# Altium PCB PCB1.PcbDoc
Units mm, origin at the board's own origin, x right, y up, seen from the top; angles counter-clockwise.
Board outline 106.05 x 110.24 mm, 2 copper layers (Top Layer, Bottom Layer); 47 components, 34 nets, 141 pads, 46 vias.
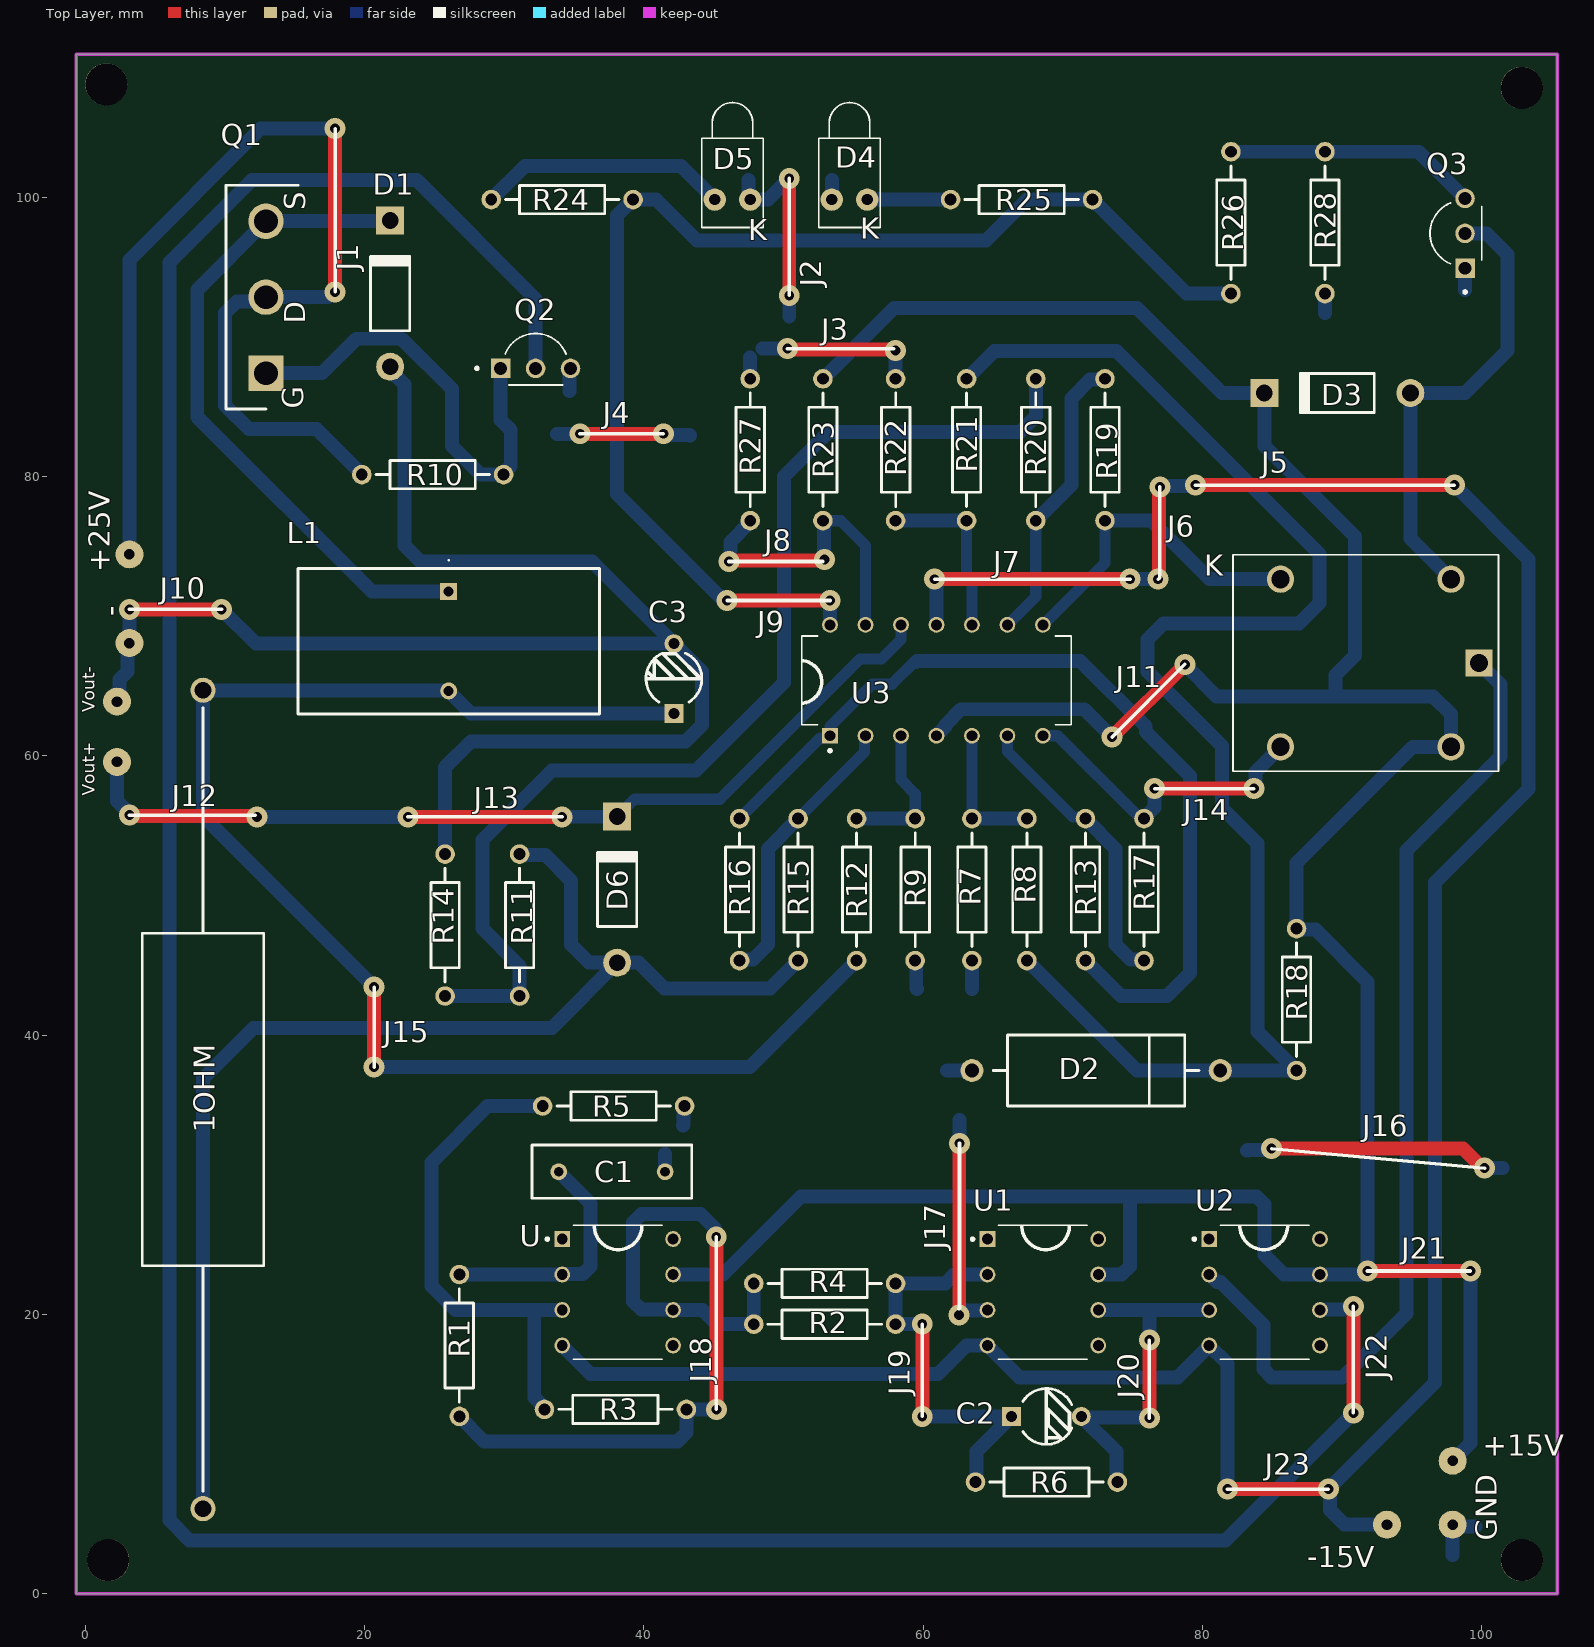
[diagram p0: Top Layer view]
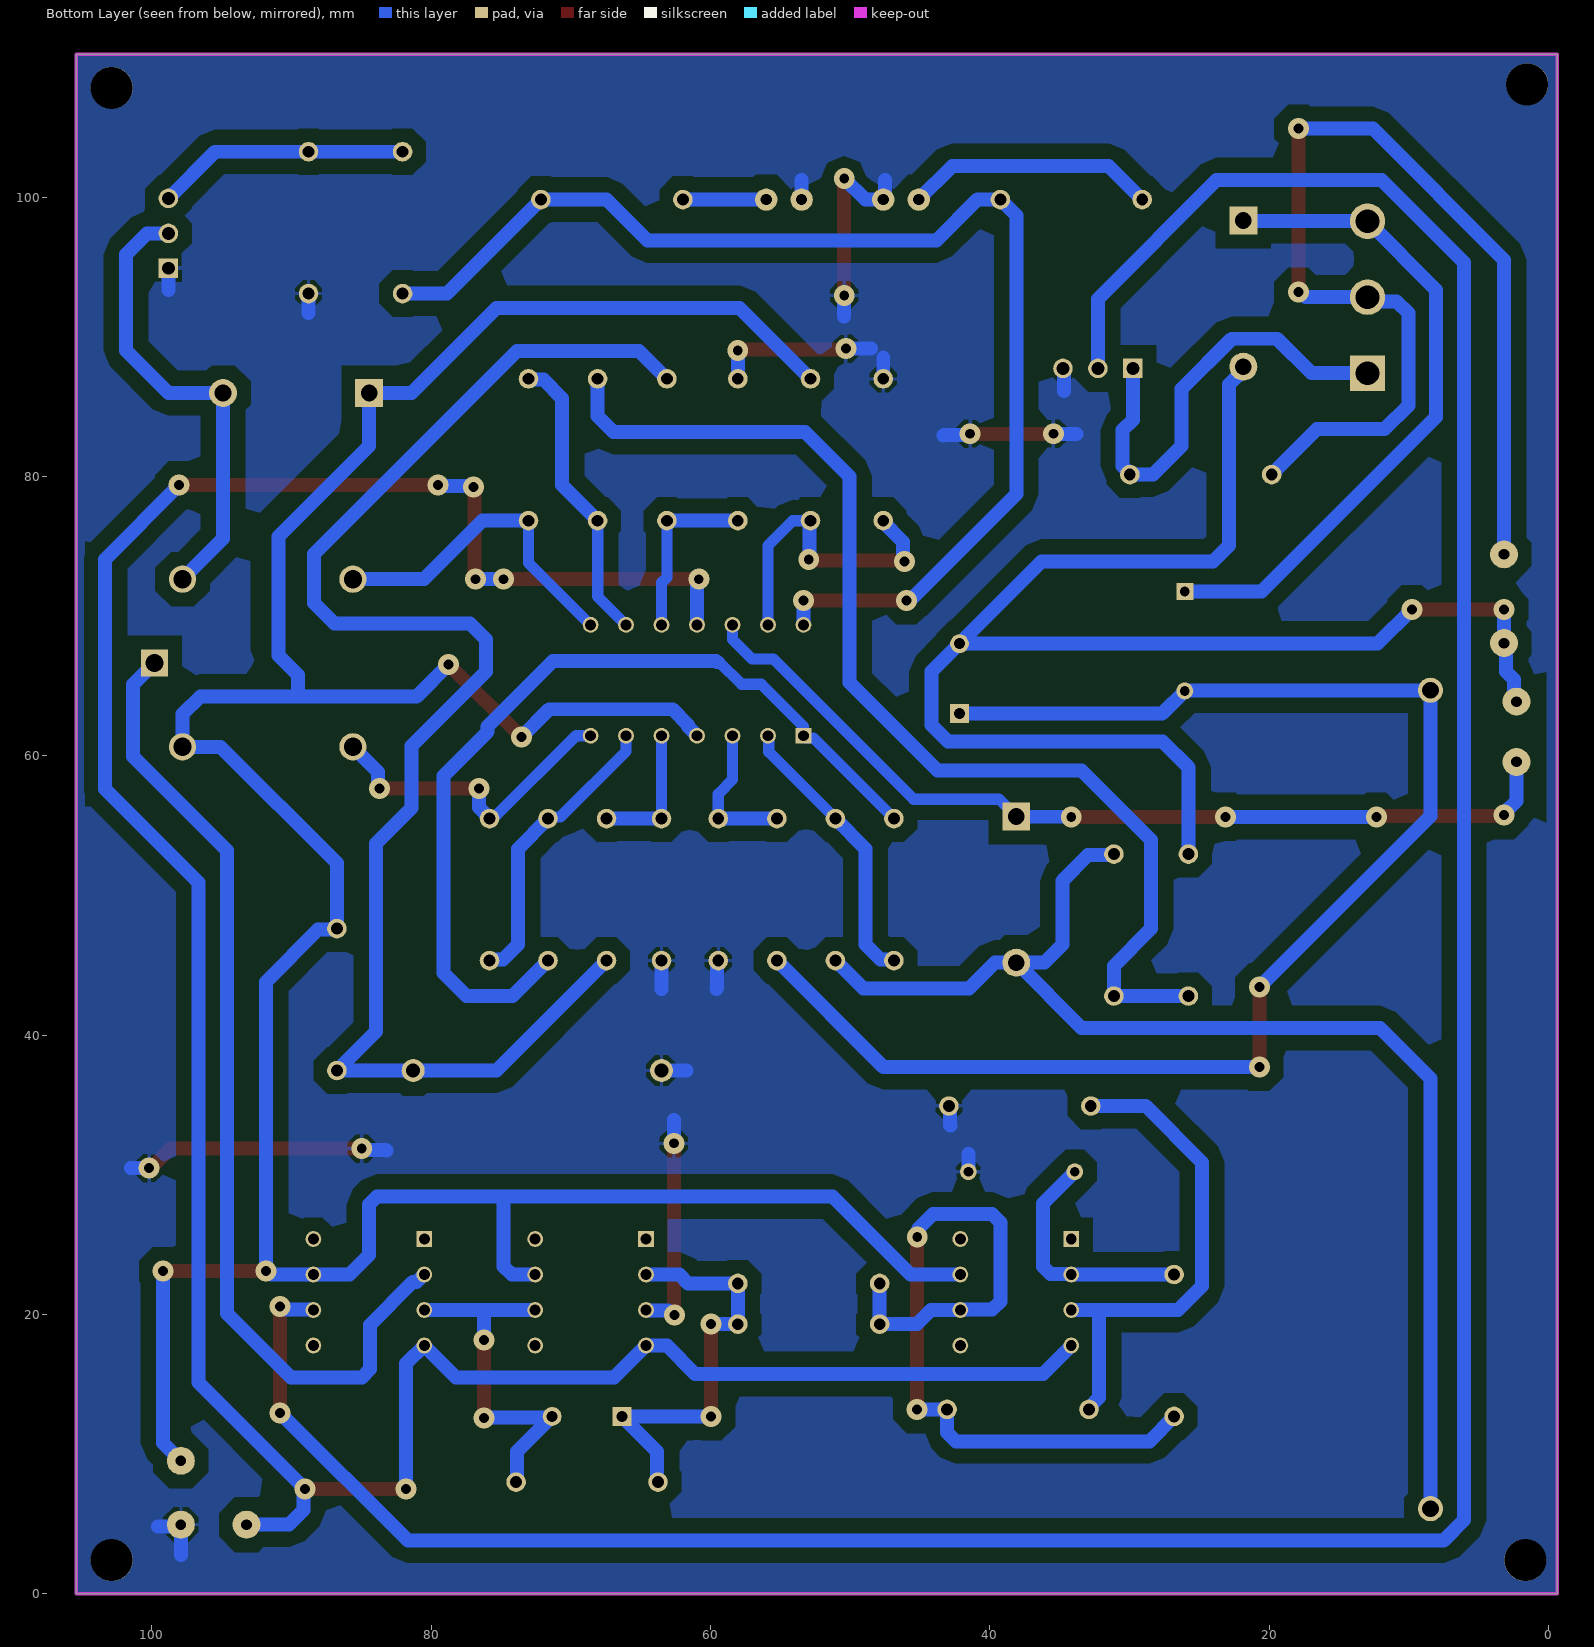
[diagram p1: Bottom Layer view, seen from below]

## Layer stack, top to bottom
Top Solder: solder mask 0.0102, Solder Resist, Dk 3.5
Top Layer: signal copper 0.0356
Dielectric 1: dielectric 0.32, FR-4, Dk 4.8
Bottom Layer: signal copper 0.0356
Bottom Solder: solder mask 0.0102, Solder Resist, Dk 3.5

## Board outline
-0.635,0 105.41,0 105.41,110.236 -0.635,110.236

## Design rules (kind name [scope] priority, off if disabled: settings)
Clearance [All] p1: gap=0 ignorepadtopadclearanceinfootprint=FALSE except(1: Arc-Arc Arc-Track Arc-Via Arc-Fill Arc-Poly Arc-Region Track-Track Track-Via Track-Fill Track-Poly Track-Region THPad-Via THPad-Fill THPad-Poly THPad-Region Via-Via Via-Fill Via-Poly Via-Region)
PolygonConnect [All] p1: connectstyle=Relief reliefconductorwidth=0.254 reliefentries=4 polygonreliefangle="90 Angle" airgapwidth=0.254
RoutingVias [All] p1: holewidth=0.711 width=1.5 viastyle="Through Hole" minholewidth=0.711 minwidth=1.5 maxholewidth=0.711 maxwidth=1.5
SolderMaskExpansion [All] p1: expansion=0.102 istentingtop=FALSE
Width [All] p1: maxlimit=1 minlimit=0.8 preferedwidth=1
30 further rules are at their usual default settings.

## Components (designator, comment, footprint, x,y, rotation, side; value= is the part's Value field where it differs from the comment)
1OHM "Current sense" RESAD5860W102L2380D870 8.449,64.696 r270 top
C1 "103" RAD-0.3 37.719,30.226 r180 top
C2 "25V" CAPR5-4X5 68.834,12.7 r0 top value=10uF
C3 "Cap2" CAPR5-4X5 42.164,65.532 r90 top value="220uF 50V"
D1 "1N5817" DO-41 21.844,93.091 r90 top
D2 "3V3" DIODE-0.7 72.39,37.465 r0 top
D3 "1N4007" DO-41 89.662,85.979 r180 top
D4 "RED (CC)" LED-1 54.737,99.822 r90 top
D5 "GREEN (CV)" LED-1 46.355,99.822 r90 top
D6 "1N5817" DO-41 38.1,50.419 r90 top
K "12V relay" TE_1461069-5 99.798,66.644 r180 top
L1 "10mH" PE92102KNL 26.035,71.755 r270 top
Q1 "4N60C3 N mos" TO544P516X1586X2557-3P 12.954,87.397 r90 top
Q2 "BC547A" TO92250P510H770-3 32.258,88.392 r0 top
Q3 "2SD400" TO92250P510H770-3 98.151,97.409 r90 top
R1 "Res2" AXIAL-0.4 26.797,17.78 r270 top value=47K
R2 "Res2" AXIAL-0.4 52.959,19.304 r0 top value=2.2K
R3 "Res2" AXIAL-0.4 37.973,13.208 r0 top value=39K
R4 "Res2" AXIAL-0.4 52.959,22.225 r0 top value=1K
R5 "Res2" AXIAL-0.4 37.846,34.925 r180 top value=33k
R6 "Res2" AXIAL-0.4 68.834,8.001 r0 top value=100
R7 "Res2" AXIAL-0.4 63.5,50.419 r90 top value=33K
R8 "Res2" AXIAL-0.4 67.437,50.419 r90 top value=10K
R9 "Res2" AXIAL-0.4 59.436,50.419 r270 top value=33K
R10 "Res2" AXIAL-0.4 24.892,80.137 r0 top value="10K 1/2W"
R11 "Res2" AXIAL-0.4 31.115,47.879 r270 top value=100K
R12 "Res2" AXIAL-0.4 55.245,50.419 r90 top value=10K
R13 "Res2" AXIAL-0.4 71.628,50.419 r90 top value=10K
R14 "Res2" AXIAL-0.4 25.781,47.879 r90 top value=33K
R15 "Res2" AXIAL-0.4 51.054,50.419 r90 top value=10K
R16 "Res2" AXIAL-0.4 46.863,50.419 r270 top value=33K
R17 "Res2" AXIAL-0.4 75.819,50.419 r270 top value=33K
R18 "Res2" AXIAL-0.4 86.741,42.545 r90 top value=2.2K
R19 "Res2" AXIAL-0.4 73.025,81.915 r270 top value=10K
R20 "Res2" AXIAL-0.4 68.072,81.915 r270 top value=10K
R21 "Res2" AXIAL-0.4 63.119,81.915 r270 top value=10K
R22 "Res2" AXIAL-0.4 58.039,81.915 r270 top value=10K
R23 "Res2" AXIAL-0.4 52.832,81.915 r90 top value=5.1K
R24 "Res2" AXIAL-0.4 34.163,99.822 r0 top value=1K
R25 "Res2" AXIAL-0.4 67.056,99.822 r0 top value=1K
R26 "Res2" AXIAL-0.4 82.042,98.171 r270 top value=10K
R27 "Res2" AXIAL-0.4 47.625,81.915 r270 top value=56K
R28 "Res2" AXIAL-0.4 88.773,98.171 r90 top value=5.1K
U "TL071CP" DIP794W45P254L959H508Q8 38.133,21.59 r0 top
U1 "TL071CP" DIP794W45P254L959H508Q8 68.58,21.59 r0 top
U2 "TL071CP" DIP794W45P254L959H508Q8 84.455,21.59 r0 top
U3 "LM324NE3" DIP794W45P254L1969H508Q14 60.96,65.405 r90 top

## Footprints (in the part's own frame and the unit in brackets; to place one, negate y for a bottom-side part, rotate by r counter-clockwise, add the part's x,y. Pads: shape width x height; smd on the part's side, far side on the other; paste and mask are expansions set on the pad)
AXIAL-0.4 [mm] "Axial Device, Thru-Hole; 2 Leads; 0.4 in Pin Spacing"
  round 1.4 hole 0.85: 1(-5.08,0) 2(5.08,0)
  silkscreen extent -4.06,-1.02 4.06,1.02
CAPR5-4X5 [mm] "Capacitor; 2 Leads"
  rect 1.35x1.35 hole 0.8: 1(-2.5,0)
  round 1.35 hole 0.8: 2(2.5,0)
  silkscreen extent -1.69,-2 1.82,2
DIODE-0.7 [mm] "Diode, Thru-Hole; 2 Leads; 0.7 in Pin Spacing"
  round 1.65 hole 1: 1(-8.89,0) 2(8.89,0)
  silkscreen extent -7.37,-2.54 7.37,2.54
DIP794W45P254L959H508Q8 [mm]
  rect 1.13x1.13 hole 0.78: 1(-3.97,3.81)
  round 1.13 hole 0.78: 2(-3.97,1.27) 3(-3.97,-1.27) 4(-3.97,-3.81) 5(3.97,-3.81) 6(3.97,-1.27) 7(3.97,1.27) 8(3.97,3.81)
  silkscreen extent -5.13,-4.79 3.17,4.79
DIP794W45P254L1969H508Q14 [mm]
  rect 1.13x1.13 / inner round 1.13 / far side rect 1.13x1.13 hole 0.78: 1(-3.97,7.62)
  round 1.13 hole 0.78: 2(-3.97,5.08) 3(-3.97,2.54) 4(-3.97,0) 5(-3.97,-2.54) 6(-3.97,-5.08) 7(-3.97,-7.62) 8(3.97,-7.62) 9(3.97,-5.08) 10(3.97,-2.54) 11(3.97,0) 12(3.97,2.54) 13(3.97,5.08) 14(3.97,7.62)
  silkscreen extent -5.13,-9.65 3.18,9.65, body extent -4.1,-9.65 4.1,9.65, height 5.08
DO-41 [mm] "Diode, Axial; Body 5.2 x 2.7 mm (LxDia. max), Lead Dia. 0.86 mm (max)"
  round 2 hole 1.2: 1(-5.23,0)
  rect 2x2 hole 1.2: 2(5.23,0)
  silkscreen extent -2.65,-1.41 2.75,1.4
LED-1 [mm] "LED; 2 Leads"
  round 1.6 hole 0.8: 1(0,1.27) 2(0,-1.27)
  silkscreen extent -2,-2.2 6.95,2.2
PE92102KNL [mm]
  rect 1.214x1.214 hole 0.708: 1(0,0)
  round 1.214 hole 0.708: 2(7.11,0)
  silkscreen extent -2.3,-10.79 8.76,10.8, body extent 0.18,-9.84 6.93,10.16, height 5.8
RAD-0.3 [mm] "Radial Cap, Thru-Hole; 2 Leads; 0.3 in Pin Spacing"
  round 1.2 hole 0.7: 1(-3.81,0) 2(3.81,0)
  silkscreen extent -5.71,-1.91 5.71,1.91
RESAD5860W102L2380D870 [mm]
  round 1.8 hole 1.2: 1(0,0) 2(58.6,0)
  silkscreen extent 1.25,-4.35 57.35,4.35
TE_1461069-5 [mm]
  rect 1.95x1.95 hole 1.3: 1(0,0)
  round 1.95 hole 1.3: 2(2,-6) 3(14.2,-6) 4(14.2,6) 5(2,6)
  silkscreen extent -1.4,-7.75 17.6,7.75
TO544P516X1586X2557-3P [mm]
  rect 2.535x2.535 / inner round 2.535 / far side rect 2.535x2.535 hole 1.69: 1(0,0)
  round 2.535 hole 1.69: 2(5.44,0) 3(10.88,0)
  silkscreen extent -2.58,-2.29 13.45,2.87, body extent -4.44,-3.25 15.56,3.5, height 5.8
TO92250P510H770-3 [mm]
  rect 1.4x1.4 hole 0.93: 1(-2.5,-0.655)
  round 1.4 hole 0.93: 2(0,-0.655) 3(2.5,-0.655)
  silkscreen extent -4.3,-1.85 2.18,1.85, body extent -2.4,-1.53 2.4,2.4, height 8

## Part data
1OHM: library part 45F25KE, "25 kOhms Â±1% 5W Through Hole Resistor Axial Wirewound", Package="Axial Ohmite", Availability="In Stock", Check_prices=https://www.snapeda.com/parts/45F25KE/Ohmite/view-part/5549197/?ref=eda, MF=Ohmite, MP=45F25KE, Price=None, Purchase-URL=https://pricing.snapeda.com/search/part/45F25KE/?ref=eda, SnapEDA_Link=https://www.snapeda.com/parts/45F25KE/Ohmite/view-part/5549197/?ref=snap
C1: library part Cap, "Capacitor", LatestRevisionDate=17-Jul-2002, LatestRevisionNote="Re-released for DXP Platform.", PackageDescription="Radial Cap, Thru-Hole; 2 Leads; 0.3 in Pin Spacing", PackageReference=RAD-0.3, Published=8-Jun-2000, Publisher="Altium Limited"
C2: library part Cap2, "Capacitor", PackageDescription="Capacitor; 2 Leads", PackageReference=CAPR5-4X5, Published=23-Sep-2002, Publisher="Altium Limited"
C3: "Capacitor", PackageDescription="Capacitor; 2 Leads", PackageReference=CAPR5-4X5, Published=23-Sep-2002, Publisher="Altium Limited"
D1 D3 D6: library part "Diode 1N4007", "1 Amp General Purpose Rectifier", Code_JEDEC=DO-204-AL, ComponentLink1Description="Manufacturer Link", ComponentLink1URL=http://www.fairchildsemi.com/, ComponentLink2Description=Datasheet, ComponentLink2URL=http://www.fairchildsemi.com/ds/1N%2F1N4001.pdf, DatasheetVersion=1998, LatestRevisionDate=17-Jul-2002, LatestRevisionNote="Re-released for DXP Platform.", PackageDescription="Diode, Axial; Body 5.2 x 2.7 mm (LxDia. max), Lead Dia. 0.86 mm (max)", PackageReference=DO-41, PackageVersion=Aug-1999, Published=8-Jun-2000, Publisher="Altium Limited"
D2: library part "D Zener", "Zener Diode", LatestRevisionDate=17-Jul-2002, LatestRevisionNote="Re-released for DXP Platform.", PackageDescription="Diode, Thru-Hole; 2 Leads; 0.7 in Pin Spacing", PackageReference=DIODE-0.7, Published=8-Jun-2000, Publisher="Altium Limited"
D4 D5: library part LED1, "Typical RED GaAs LED", LatestRevisionDate=08-Jul-2005, LatestRevisionNote="Mech Layer 1 removed.", PackageDescription="LED; 2 Leads", PackageReference=LED-1, Published=8-Jun-2000, Publisher="Altium Limited"
K: library part 1461069-5, "General Purpose Relay SPDT _1 Form C_ 12VDC Coil Through Hole", Package=None, Availability=Unavailable, MF="TE Connectivity", MP=1461069-5, Price=None, SnapEDA_Link=https://www.snapeda.com/parts/1461069-5/TE%20Connectivity%20Potter%20%26%20Brumfield%20Relays/view-part/410849/?ref=snap, TE_purchase_URL=https://www.te.com/usa-en/product-1461069-5.html?te_bu=Cor&te_type=disp&te_campaign=seda_glo_cor-seda-global-disp-prtnr-fy19-seda-model-bom-cta_sma-317_1&elqCampaignId=32493
L1: library part PE-92102KNL, "Pulse 100 uH +/-20% Leaded Inductor, 2.6A Idc, 100m Rdc", Manufacturer_Name=Pulse, Mouser Part Number=673-PE-92102KNL, Arrow Part Number=PE-92102KNL, Arrow Price/Stock=https://www.arrow.com/en/products/pe-92102knl/pulse-electronics-corporation?region=europe, Datasheet Link=https://componentsearchengine.com/Datasheets/2/PE-92102KNL.pdf, Geometry.Height=21.59mm, Manufacturer_Part_Number=PE-92102KNL, Mouser Price/Stock=https://www.mouser.co.uk/ProductDetail/Pulse-Electronics/PE-92102KNL?qs=XfNjFG7P%252BGKs3THbSp7mZw%3D%3D
Q1: library part SPW24N60C3, "Infineon SPW24N60C3 N-channel MOSFET Transistor, 24.3 A, 650 V, 3-Pin TO-247", Manufacturer_Name=Infineon, Mouser Part Number=726-SPW24N60C3, Datasheet Link=https://static.chipdip.ru/lib/046/DOC003046521.pdf, Geometry.Height=5.16mm, Manufacturer_Part_Number=SPW24N60C3, Mouser Price/Stock=https://www.mouser.co.uk/ProductDetail/Infineon-Technologies/SPW24N60C3?qs=OWKQh20chupSsK1UtjrB3Q%3D%3D
Q2: "Bipolar (BJT) Transistor NPN 45 V 100 mA 300MHz 625 mW Through Hole TO-92 (TO-226)", Package="E-PKG AXIAL-LEADED-2 ON Semiconductor", Availability="In Stock", Check_prices=https://www.snapeda.com/parts/BC547A/Onsemi/view-part/?ref=eda, MF="ON Semiconductor", MP=BC547A, Price=None, Purchase-URL=https://pricing.snapeda.com/search/part/BC547A/?ref=eda, SnapEDA_Link=https://www.snapeda.com/parts/BC547A/Onsemi/view-part/?ref=snap
Q3: "TO-92MOD Transistor (NPN). Low-Frequency Power Amp, Electronic Governor Applications.", Package="TO-92 Sanyo", Availability="Not in stock", Check_prices=https://www.snapeda.com/parts/2SD400/LGE/view-part/?ref=eda, MF=LGE, MP=2SD400, Price=None, SnapEDA_Link=https://www.snapeda.com/parts/2SD400/LGE/view-part/?ref=snap
R1 R2 R3 R4 R5 R6 R7 R8 R9 R10 R11 R12 R13 R14 R15 R16 R17 R18 R19 R20 R21 R22 R23 R24 R25 R26 R27 R28: "Resistor", LatestRevisionDate=17-Jul-2002, LatestRevisionNote="Re-released for DXP Platform.", PackageDescription="Axial Device, Thru-Hole; 2 Leads; 0.4 in Pin Spacing", PackageReference=AXIAL-0.4, Published=8-Jun-2000, Publisher="Altium Limited"
U U1 U2: "Low-Noise JFET-Input General-Purpose Operational Amplifier 8-PDIP 0 to 70", Package="PDIP-8 Texas Instruments", Availability=Warning, DigiKey-Purchase-URL=https://snapeda.com/shop?store=DigiKey&id=52481, MF="Texas Instruments", Mouser-Purchase-URL=https://snapeda.com/shop?store=Mouser&id=52481, MP=TL071CP, Price=None, SnapEDA_Link=https://www.snapeda.com/parts/TL071CP/Texas%20Instruments/view-part/52481/?ref=snap, Texas_Instruments-Purchase-URL=https://snapeda.com/shop?store=Texas+Instruments&id=52481
U3: "Quad, 30-V, 1.2-MHz operational amplifier", Package="PDIP-14 Texas Instruments", Availability="In Stock", Check_prices=https://www.snapeda.com/parts/LM324NE3/Texas+Instruments/view-part/?ref=eda, MF="Texas Instruments", MP=LM324NE3, Price=None, Purchase-URL=https://pricing.snapeda.com/search/part/LM324NE3/?ref=eda, SnapEDA_Link=https://www.snapeda.com/parts/LM324NE3/Texas+Instruments/view-part/?ref=snap

## Free pads (board coordinates)
  round 2 hole 0.762: 23(2.286,59.563) 23(2.286,63.881) 23(3.175,68.072) 23(3.175,74.422) 23(93.218,4.953) 23(97.917,4.953) 23(97.917,9.525)
  round 3 hole 3 unplated: 24(1.524,108.077) 24(1.651,2.413) 24(102.87,2.413) 24(102.87,107.823)

## Via types
v1: diameter 1.5, hole 0.711, Top Layer to Bottom Layer, 46 vias

## Nets (pads, with @x,y where several pads share a name; then routed paths per layer and width w, separated by ;. In a path a pad name is that pad's centre, name@x,y a point inside that pad or via, vN(x,y) a via of type N, cw(c..) or ccw(c..) an arc to the next point about the centre after c; other vN are vias at no path point)
+15V: D3.2 K.5 pad.23@97.917,9.525 R18.2 R23.2 U1.7 U2.7 U3.4 U.7 | length 237.3
  Top Layer w1: v1(73.533,61.341) v1(78.74,66.548) ; v1(91.821,23.114) v1(99.187,23.114)
  Bottom Layer w1: U.7 45.686,22.86 51.274,28.448 74.803,28.448 ; R23.2 57.912,92.075 75.311,92.075 81.407,85.979 D3.2 84.432,82.192 90.932,75.692 90.932,67.183 89.535,65.786 89.535,64.262 ; U3.4 60.96,61.47 61.6,62.11 61.6,62.222 62.713,63.335 71.539,63.335 v1(73.533,61.341) ; U1.7 74.217,22.86 74.803,23.446 74.803,28.448 ; v1(78.74,66.548) 81.026,64.262 89.535,64.262 ; v1@91.432,22.86 U2.7 85.852,22.86 84.455,24.257 84.455,27.862 83.869,28.448 74.803,28.448 ; v1(91.821,23.114) 91.821,43.819 88.092,47.548 86.818,47.548 R18.2 86.741,52.324 95.061,60.644 K.5 97.798,62.984 96.52,64.262 89.535,64.262 ; pad.23@97.917,9.525 99.187,10.795 v1(99.187,23.114)
+25V: pad.23@3.175,74.422 Q1.2 R10.1 | length 78.2
  Top Layer w1: v1(17.907,93.218) v1(17.907,104.902)
  Bottom Layer w1: pad.23@3.175,74.549 3.175,95.504 12.573,104.902 v1(17.907,104.902) ; v1(17.907,93.218) 17.772,93.218 17.391,92.837 Q1.2 12.66,92.543 10.882,92.543 10.033,91.694 10.033,85.09 11.732,83.391 16.558,83.391 R10.1
-15V: pad.23@93.218,4.953 U1.4 U2.4 U3.11 U.4 | length 201.2
  Top Layer w1: v1(60.833,72.644) v1(74.825,72.644) ; v1(76.835,72.644) 76.898,72.707 76.898,79.184 v1(76.962,79.248) ; v1(79.502,79.375) v1(98.044,79.375) ; v1(81.788,7.493) v1(89.027,7.493)
  Bottom Layer w1: U.4 36.195,15.748 61.087,15.748 63.119,17.78 U1.4 66.896,15.494 78.232,15.494 80.485,17.747 U2.4 81.788,16.477 v1(81.788,7.493) ; v1(60.833,72.644) 60.833,72.509 60.96,72.382 U3.11 ; v1(74.825,72.644) v1(76.835,72.644) ; v1(76.962,79.248) 77.025,79.311 79.438,79.311 v1(79.502,79.375) ; pad.23@93.218,4.953 90.17,4.953 89.123,6 89.123,7.397 v1(89.027,7.493) 96.647,15.113 96.647,50.927 103.346,57.626 103.346,74.073 v1(98.044,79.375)
Buck-: C3.2 D1.1 pad.23@2.286,63.881 pad.23@3.175,68.072 R14.2 | length 114.9
  Top Layer w1: v1(3.175,70.485) v1(9.779,70.485)
  Bottom Layer w1: pad.23@2.286,63.881 2.477,64.072 2.477,65.469 3.048,66.04 3.048,67.437 3.175,68.072 v1(3.175,70.485) ; v1(9.779,70.485) 12.232,68.032 C3.2 ; D1.1 21.844,87.59 22.86,86.574 22.86,75.057 24.003,73.914 36.282,73.914 C3.2 ; R14.2 25.781,59.182 27.631,61.032 42.992,61.032 44.164,62.204 44.164,66.032 C3.2
GND: C1.1 D2.1 D4.1 D5.2 pad.23@97.917,4.953 Q2.3 Q3.1 R5.1 R7.1 R9.2 R22.1 R27.1 R28.1 U1.3 | length 91.1
  Top Layer w1: v1(35.433,83.058) v1(41.402,83.058) ; v1(50.292,89.154) 50.357,89.089 57.977,89.089 v1(58.042,89.024) ; v1(50.419,92.964) v1(50.419,101.346) ; v1(62.573,19.963) 62.592,19.982 62.592,32.239 v1(62.611,32.258) ; v1(84.963,31.877) 98.671,31.877 100.068,30.48 v1(100.203,30.48)
  Bottom Layer w1: 33.782,83.058 v1(35.433,83.058) ; 34.671,86.106 34.681,86.116 34.681,87.66 Q2.3 ; v1(41.402,83.058) 41.498,82.962 43.276,82.962 43.307,82.931 ; C1.1 41.529,31.496 ; 42.799,33.528 42.849,33.578 42.849,34.848 R5.1 ; 47.498,101.219 47.51,101.207 47.51,99.937 D5.2 48.895,99.822 v1(50.419,101.346) ; R27.1 47.625,88.519 ; 48.514,89.154 v1(50.292,89.154) ; 50.419,91.44 v1(50.419,92.964) ; D4.1 53.467,101.219 ; R22.1 58.041,86.997 58.041,89.022 v1(58.042,89.024) ; R9.2 59.513,45.262 59.513,43.357 59.563,43.307 ; 61.722,37.465 D2.1 ; v1(62.573,19.963) 62.709,19.963 63.041,20.295 64.585,20.295 U1.3 ; v1(62.611,32.258) 62.611,33.909 ; 63.5,43.307 R7.1 ; 83.185,31.75 83.216,31.781 84.867,31.781 v1(84.963,31.877) ; 88.773,91.694 R28.1 ; 97.917,2.794 97.917,4.953 98.044,4.826 99.568,4.826 ; 98.806,93.345 Q3.1 ; v1(100.203,30.48) 101.473,30.48
Net1OHM_1: 1OHM.1 C3.1 L1.2 R12.1 | length 104.2
  Top Layer w1: v1(20.701,37.719) v1(20.701,43.434)
  Bottom Layer w1: v1(20.701,37.719) 47.625,37.719 R12.1 ; v1(20.701,43.434) 8.449,55.686 1OHM.1 8.474,64.67 26.01,64.67 L1.2 27.648,63.032 C3.1
Net1OHM_2: 1OHM.2 D6.1 R11.1 R15.1 | length 91.3
  Bottom Layer w1: 1OHM.2 8.449,36.897 12.065,40.513 33.424,40.513 D6.1 ; R11.1 31.192,52.882 32.97,52.882 34.798,51.054 34.798,46.482 36.091,45.189 D6.1 ; R15.1 49.054,43.339 41.497,43.339 39.624,45.212 38.123,45.212 D6.1
NetC1_2: C1.2 R1.1 U.2 | length 17.4
  Bottom Layer w1: R1.1 U.2 34.188,22.885 35.634,22.885 36.195,23.446 36.195,27.94 C1.2
NetC2_1: C2.1 R2.2 R4.2 R6.1 U1.2 | length 30.4
  Top Layer w1: v1(59.944,12.7) v1(59.944,19.304)
  Bottom Layer w1: v1(59.944,12.7) C2.1 63.831,10.197 63.831,8.078 R6.1 ; v1(59.944,19.304) R2.2 R4.2 61.595,22.225 62.23,22.86 U1.2
NetC2_2: C2.2 R6.2 U1.6 U2.3 | length 26.3
  Top Layer w1: v1(76.2,12.573) v1(76.2,18.161)
  Bottom Layer w1: C2.2 C2.2@71.397,12.636 ; U1.6 76.2,20.32 ; R6.2 73.837,8.078 73.837,10.197 C2.2@71.397,12.636 ; v1(76.2,12.573) 76.137,12.636 C2.2@71.397,12.636 ; v1(76.2,18.161) 76.2,20.32 ; U2.3 76.2,20.32
NetD1_2: D1.2 L1.1 Q1.3 | length 48.1
  Bottom Layer w1: D1.2 21.822,98.299 12.976,98.299 Q1.3 8.033,93.356 8.033,84.262 20.54,71.755 L1.1
NetD2_2: D2.2 R8.1 R18.1 R21.1 | length 106.9
  Bottom Layer w1: R21.1 65.119,88.995 73.853,88.995 88.392,74.456 88.392,70.944 86.917,69.469 77.216,69.469 76.073,68.326 76.073,66.033 81.407,60.699 81.407,56.261 83.947,53.721 83.947,40.259 R18.1 D2.2 75.311,37.465 R8.1
NetD3_1: D3.1 K.2 Q3.2 | length 33.3
  Bottom Layer w1: K.2 94.892,75.55 D3.1 98.806,85.979 101.854,89.027 101.854,95.885 100.33,97.409 Q3.2
NetD4_2: D4.2 R25.1 | length 6
  Bottom Layer w1: D4.2 R25.1
NetD5_1: D5.1 R24.1 | length 18
  Bottom Layer w1: R24.1 31.496,102.235 42.672,102.235 D5.1
NetD6_2: D6.2 pad.23@2.286,59.563 U3.12 | length 65.8
  Top Layer w1: v1(3.175,55.753) 3.238,55.689 12.255,55.689 v1(12.319,55.626) ; v1(23.114,55.626) v1(34.163,55.626)
  Bottom Layer w0.8: D6.2 39.347,56.896 45.466,56.896 55.499,66.929 57.023,66.929 58.42,68.326 U3.12
  Bottom Layer w1: pad.23@2.286,59.563 2.286,56.777 3.175,55.888 v1(3.175,55.753) ; v1(12.319,55.626) v1(23.114,55.626) ; v1(34.163,55.626) 34.174,55.637 38.088,55.637 D6.2
NetK_1: K.1 U2.2 | length 70.9
  Bottom Layer w1: U2.2 80.52,22.86 81.06,22.32 81.313,22.32 84.377,19.256 84.377,16.08 84.963,15.494 90.043,15.494 94.615,20.066 94.615,53.213 101.346,59.944 101.346,65.096 K.1
NetK_3: K.3 R19.2 U3.8 | length 23.6
  Bottom Layer w0.8: U3.8 73.025,73.82 R19.2
  Bottom Layer w1: R19.2 76.327,76.835 80.518,72.644 K.3
NetK_4: K.4 R17.1 U3.7 | length 23.3
  Top Layer w1: v1(76.581,57.658) v1(83.693,57.658)
  Bottom Layer w0.8: U3.7 69.629,61.435 75.45,55.614 75.542,55.614 75.755,55.4 R17.1@75.755,55.308
  Bottom Layer w1: R17.1@75.755,55.314 75.755,55.459 76.581,56.285 v1(76.581,57.658) ; v1(83.693,57.658) 83.789,57.754 83.789,58.835 K.4
NetQ1_1: Q1.1 Q2.1 R10.2 | length 32.6
  Bottom Layer w1: Q1.1 16.965,87.397 19.429,89.861 22.672,89.861 26.284,86.249 26.284,82.174 28.321,80.137 R10.2 29.972,80.245 30.48,80.753 30.48,83.312 29.758,84.034 Q2.1
NetQ2_2: Q2.2 U2.6 | length 226.5
  Top Layer w1: v1(90.805,12.954) v1(90.805,20.574)
  Bottom Layer w1: Q2.2 32.258,92.71 23.749,101.219 11.938,101.219 6.033,95.314 6.033,5.27 7.493,3.81 81.661,3.81 v1(90.805,12.954) ; U2.6 88.45,20.345 90.441,20.345 90.67,20.574 v1(90.805,20.574)
NetQ3_3: Q3.3 R26.1 R28.2 | length 18.1
  Bottom Layer w1: R26.1 R28.2 95.464,103.251 Q3.3
NetR1_2: R1.2 R2.1 R3.2 R4.1 U.6 | length 58.5
  Top Layer w1: v1(45.191,25.548) 45.202,25.537 45.202,13.218 v1(45.212,13.208)
  Bottom Layer w1: R1.2 28.575,10.922 42.418,10.922 43.053,11.557 R3.2 v1(45.212,13.208) ; v1(45.191,25.548) 45.096,25.643 45.096,26.151 44.069,27.178 39.829,27.178 39.243,26.592 39.243,20.931 39.829,20.345 42.078,20.345 U.6 44.196,20.32 45.212,19.304 R2.1 R4.1
NetR3_1: R3.1 R5.2 U.3 | length 36
  Bottom Layer w1: R5.2 28.829,34.925 24.797,30.893 24.797,22.032 26.509,20.32 32.131,20.32 ; R3.1 32.893,13.316 32.163,14.046 32.163,20.288 32.131,20.32 ; U.3 32.131,20.32
NetR7_2: R7.2 R8.2 U3.5 | length 9.9
  Bottom Layer w0.8: R7.2 U3.5
  Bottom Layer w1: R7.2 R8.2
NetR9_1: R9.1 R12.2 U3.3 | length 10.5
  Bottom Layer w0.8: U3.3 58.42,58.293 59.436,57.277 R9.1
  Bottom Layer w1: R12.2 R9.1
NetR11_2: R11.2 R14.1 R20.1 | length 81.1
  Bottom Layer w1: R14.1 R11.2 31.115,44.958 28.448,47.625 28.448,53.975 33.423,58.95 43.738,58.95 50.038,65.249 50.038,80.01 53.213,83.185 66.929,83.185 68.072,84.328 R20.1
NetR13_1: R13.1 R16.1 U3.1 | length 64.3
  Bottom Layer w0.8: R16.1 52.634,61.27 53.175,61.27 U3.1 53.34,62.103 56.366,65.129 57.769,65.129 59.371,66.731 59.512,66.731
  Bottom Layer w1: 59.512,66.731 59.583,66.802 71.254,66.802 75.946,62.11 75.946,61.722 79.121,58.547 79.121,44.45 77.47,42.799 74.168,42.799 R13.1
NetR13_2: R13.2 R17.2 U3.6 | length 21.1
  Bottom Layer w0.8: U3.6 66.04,60.325 70.751,55.614 71.513,55.614 R13.2
  Bottom Layer w1: R13.2 73.787,53.34 73.787,46.482 74.853,45.416 75.742,45.416 R17.2
NetR15_2: R15.2 R16.2 U3.2 | length 20.4
  Bottom Layer w0.8: R15.2 55.817,60.262 55.817,61.372 U3.2
  Bottom Layer w1: R16.2 46.94,45.416 47.829,45.416 48.895,46.482 48.895,53.34 R15.2
NetR19_1: R19.1 R20.2 U3.9 | length 21.1
  Bottom Layer w0.8: U3.9 66.04,69.381 68.072,71.413 R20.2
  Bottom Layer w1: R20.2 70.612,79.375 70.612,85.598 71.961,86.947 72.977,86.947 R19.1
NetR21_2: R21.2 R22.2 U3.10 | length 12.7
  Bottom Layer w0.8: R21.2 63.119,72.771 63.5,72.39 U3.10
  Bottom Layer w1: R22.2 R21.2
NetR23_1: R23.1 R27.2 U3.13 | length 22.8
  Top Layer w1: v1(46.101,73.914) 46.164,73.977 52.895,73.977 v1(52.959,74.041)
  Bottom Layer w0.8: R23.1 54.102,76.835 55.88,75.057 U3.13
  Bottom Layer w1: v1(46.101,73.914) 46.197,74.01 46.197,75.298 47.625,76.727 R27.2 ; R23.1 52.895,76.772 52.895,74.105 v1(52.959,74.041)
NetR24_2: R24.2 R25.2 R26.2 U3.14 | length 89.7
  Top Layer w1: v1(45.974,71.12) v1(53.34,71.12)
  Bottom Layer w1: v1(45.974,71.12) 45.878,71.216 45.617,71.216 38.1,78.733 38.1,98.679 R24.2 40.894,99.822 43.815,96.901 64.516,96.901 67.437,99.822 R25.2 78.867,93.091 R26.2 ; U3.14 v1(53.34,71.12)
pads on no net: U1.1 U1.5 U1.8 U2.1 U2.5 U2.8 U.1 U.5 U.8

## Polygon pours and split planes (outlines as drawn)
GND on Bottom Layer "GND_L02_P001" (solid, pour order 1): -0.635,110.236 0.127,110.236 0.127,0 -0.635,0
GND on Bottom Layer "GND_L02_P000" (solid, pour order 0): 0,110.236 105.41,110.236 105.41,0 0,0 0,0.381
GND on Bottom Layer "GND_L02_P002" (solid, pour order 2): 104.8,75.351 104.8,55.347 104.902,55.245 105.029,55.372 105.41,55.372 105.41,76.835

## Keep-outs
Keep-Out Layer:
  the board outline again, w0.254

## Silkscreen, mask and mechanical layers (free items; w line width, h text height)
Top Overlay:
  lines w0.254: 3.175,55.753 12.192,55.753 ; 3.175,70.485 9.779,70.485 ; 17.907,93.218 17.907,104.902 ; 20.701,37.719 20.701,43.434 ; 23.114,55.626 34.163,55.626 ; 35.433,83.058 41.402,83.058 ; 36.459,26.278 ccw(c38.163,26.352) 39.869,26.289 ; 40.259,65.532 44.069,65.532 42.291,67.31 41.373,67.31 43.151,65.532 42.164,65.532 40.767,66.929 40.767,65.532 40.259,66.04 ; 45.191,13.229 45.191,25.548 ; 45.974,71.12 53.34,71.12 ; 46.101,73.914 52.832,73.914 ; 50.292,89.154 57.912,89.154 ; 50.419,92.964 50.419,101.346 ; 51.417,63.777 ccw(c51.219,65.291) 51.435,66.802 ; 59.944,12.7 59.944,19.304 ; 60.833,72.644 74.825,72.644 ; 62.573,20.409 62.611,20.447 62.611,32.258 ; 67.066,26.278 ccw(c68.77,26.352) 70.476,26.289 ; 68.834,10.795 68.834,14.605 70.485,12.954 70.485,11.684 68.961,13.208 68.961,12.065 69.85,11.176 68.961,11.176 ; 73.533,61.341 78.74,66.548 ; 76.2,12.573 76.2,18.161 ; 76.581,57.658 83.693,57.658 ; 76.835,72.644 76.962,72.771 76.962,79.248 ; 79.502,79.375 98.044,79.375 ; 81.788,7.493 89.027,7.493 ; 82.687,26.278 ccw(c84.391,26.352) 86.097,26.289 ; 84.963,31.877 100.203,30.48 ; 90.805,12.954 90.805,20.574 ; 91.821,23.114 99.187,23.114
  text "S" at 15.748,99.06 h1.52 r90
  text "K" at 55.499,97.028 h1.52
  text "K" at 47.498,96.901 h1.52
  text "J1" at 19.558,94.742 h1.52 r90
  text "J2" at 52.705,93.599 h1.52 r90
  text "D" at 15.748,90.932 h1.52 r90
  text "J3" at 52.705,89.789 h1.52
  text "G" at 15.621,84.836 h1.52 r90
  text "J4" at 37.084,83.82 h1.52
  text "J5" at 84.201,80.264 h1.52
  text "J6" at 77.47,75.692 h1.52
  text "J8" at 48.641,74.676 h1.52
  text "+25V" at 1.778,73.152 h1.52 r90
  text "J7" at 65.024,73.152 h1.52
  text "J10" at 5.334,71.247 h1.52
  text "-" at 2.54,69.977 h1.52 r90
  text "J9" at 48.133,68.834 h1.52
  text "J11" at 73.787,64.897 h1.52
  text "Vout-" at 1,63.12 h1.52 r90
  text "Vout+" at 1,57.151 h1.52 r90
  text "J12" at 6.223,56.388 h1.52
  text "J13" at 27.813,56.261 h1.52
  text "J14" at 78.613,55.372 h1.52
  text "J15" at 21.336,39.497 h1.52
  text "J16" at 91.44,32.766 h1.52
  text "J17" at 61.595,24.638 h1.52 r90
  text "J21" at 94.234,24.003 h1.52
  text "J22" at 93.218,15.367 h1.52 r90
  text "J18" at 44.831,15.113 h1.52 r90
  text "J19" at 59.055,14.224 h1.52 r90
  text "J20" at 75.438,13.97 h1.52 r90
  text "+15V" at 100.076,9.889 h1.52
  text "J23" at 84.455,8.509 h1.52
  text "GND" at 101.092,3.81 h1.52 r90
  text "-15V" at 87.503,1.905 h1.52

## Dimensions
-0.635,0 to 105.41,-1.524 on Top Overlay
105.41,0 to 105.41,110.236 on Top Overlay